# EAGLE board Solar_Breakout (EAGLE 7.1.0)

Size 25.7 x 12.69 mm. Coordinates in mm from the lower left corner, seen from the top.
Outline: 0,0 25.7,0 25.7,12.69 0,12.69 0,0
Copper layers (1*16): Top 0.035mm / dielectric 1.5mm / Bottom 0.035mm
Design rules "default": minimum track width 10mil, minimum drill 24mil, track to track 8mil, track to pad 8mil, pad to pad 8mil, via to via 8mil, smd to smd 8mil, copper to edge 40mil, drill to drill 8mil, minimum pad ring 10mil, minimum via ring 8mil, stop-mask expansion 4mil, vias tented up to drill 0mil, thermal gap 10mil

## Footprints (pad centres in the part's own frame; a part is rotated, then mirrored left to right if it is on the bottom)
QFN20 = smd 0.75 x 0.3: 1 -2,1; 2 -2,0.5; 3 -2,0; 4 -2,-0.5; 5 -2,-1; 11 2,-1; 12 2,-0.5; 13 2,0; 14 2,0.5; 15 2,1 | smd 0.3 x 0.75: 6 -1,-2; 7 -0.5,-2; 8 0,-2; 9 0.5,-2; 10 1,-2; 16 1,2; 17 0.5,2; 18 0,2; 19 -0.5,2; 20 -1,2
1X10-BIG = drill 1.016 pad 1.778 octagon: 1 -11.43,0; 2 -8.89,0; 3 -6.35,0; 4 -3.81,0; 5 -1.27,0; 6 1.27,0; 7 3.81,0; 8 6.35,0; 9 8.89,0; 10 11.43,0

## Placement (x,y rotation side)
IC1  MCP73871  [QFN20]  12.7,6.35 0 top
U$1  PINHD-1X10  [1X10-BIG]  12.7,1.27 0 top
U$2  PINHD-1X10  [1X10-BIG]  12.7,11.43 180 top

## Library data of the parts
IC1 U$1 U$2 = adafruit

## Nets
N$1: IC1.1 U$1.1
N$2: IC1.2 U$1.2
N$3: IC1.3 U$1.3
N$4: IC1.4 U$1.4
N$5: IC1.5 U$1.5
N$6: IC1.6 U$1.6
N$7: IC1.7 U$1.7
N$8: IC1.8 U$1.8
N$9: IC1.9 U$1.9
N$10: IC1.10 U$1.10
N$11: IC1.11 U$2.1
N$12: IC1.12 U$2.2
N$13: IC1.13 U$2.3
N$14: IC1.14 U$2.4
N$15: IC1.15 U$2.5
N$16: IC1.16 U$2.6
N$17: IC1.17 U$2.7
N$18: IC1.18 U$2.8
N$19: IC1.19 U$2.9
N$20: IC1.20 U$2.10

## Tracks (layer width: path | path; a pad name or v marks a point on that pad's centre or on a via)
N$1  (1 unrouted)
N$2  (1 unrouted)
N$3  (1 unrouted)
N$4  (1 unrouted)
N$5  (1 unrouted)
N$6  (1 unrouted)
N$7  (1 unrouted)
N$8  (1 unrouted)
N$9  (1 unrouted)
N$10  (1 unrouted)
N$11  (1 unrouted)
N$12  (1 unrouted)
N$13  (1 unrouted)
N$14  (1 unrouted)
N$15  (1 unrouted)
N$16  (1 unrouted)
N$17  (1 unrouted)
N$18  (1 unrouted)
N$19  (1 unrouted)
N$20  (1 unrouted)